# Altium PCB gba-zero.PcbDoc
Units mm, origin at the board's own origin, x right, y up, seen from the top; angles counter-clockwise.
Board outline 130.69 x 72.91 mm, 16 copper layers (Top, Route2, Route3, Route4, Route5, Route6, Route7, Route8, Route9, Route10, Route11, Route12, Route13, Route14, Route15, Bottom), stack 0.888 mm thick; 60 components, 64 nets, 294 pads, 51 vias.
Unrouted connection lines stored in the file: 12.
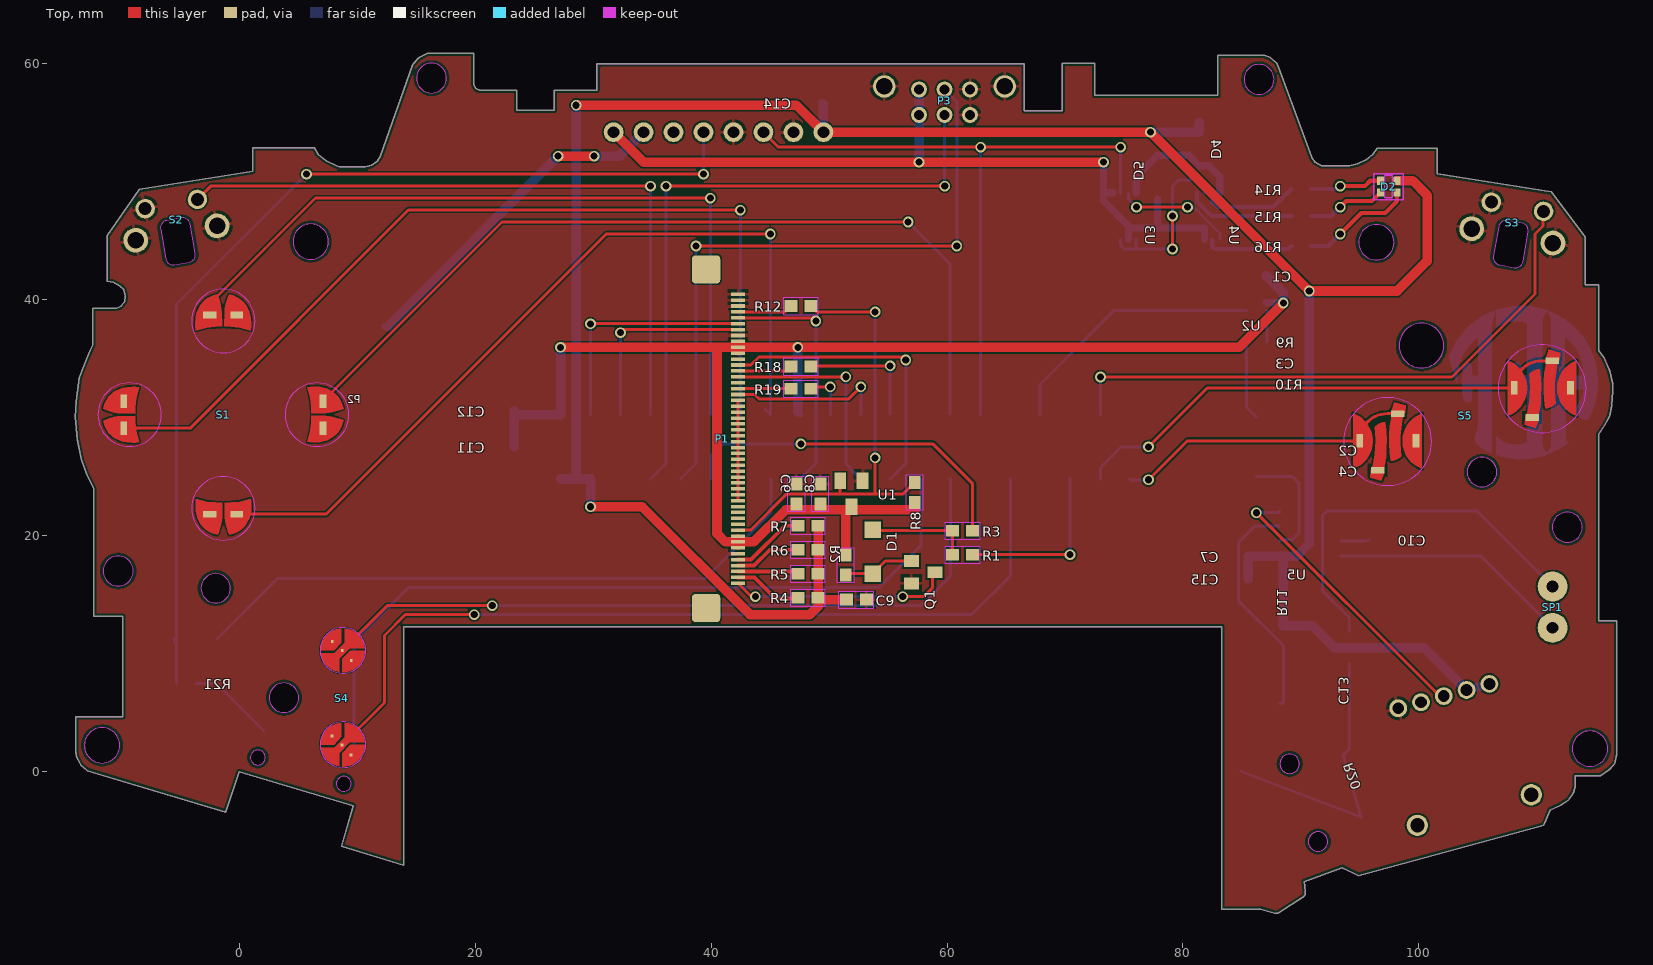
[diagram p0: Top view]
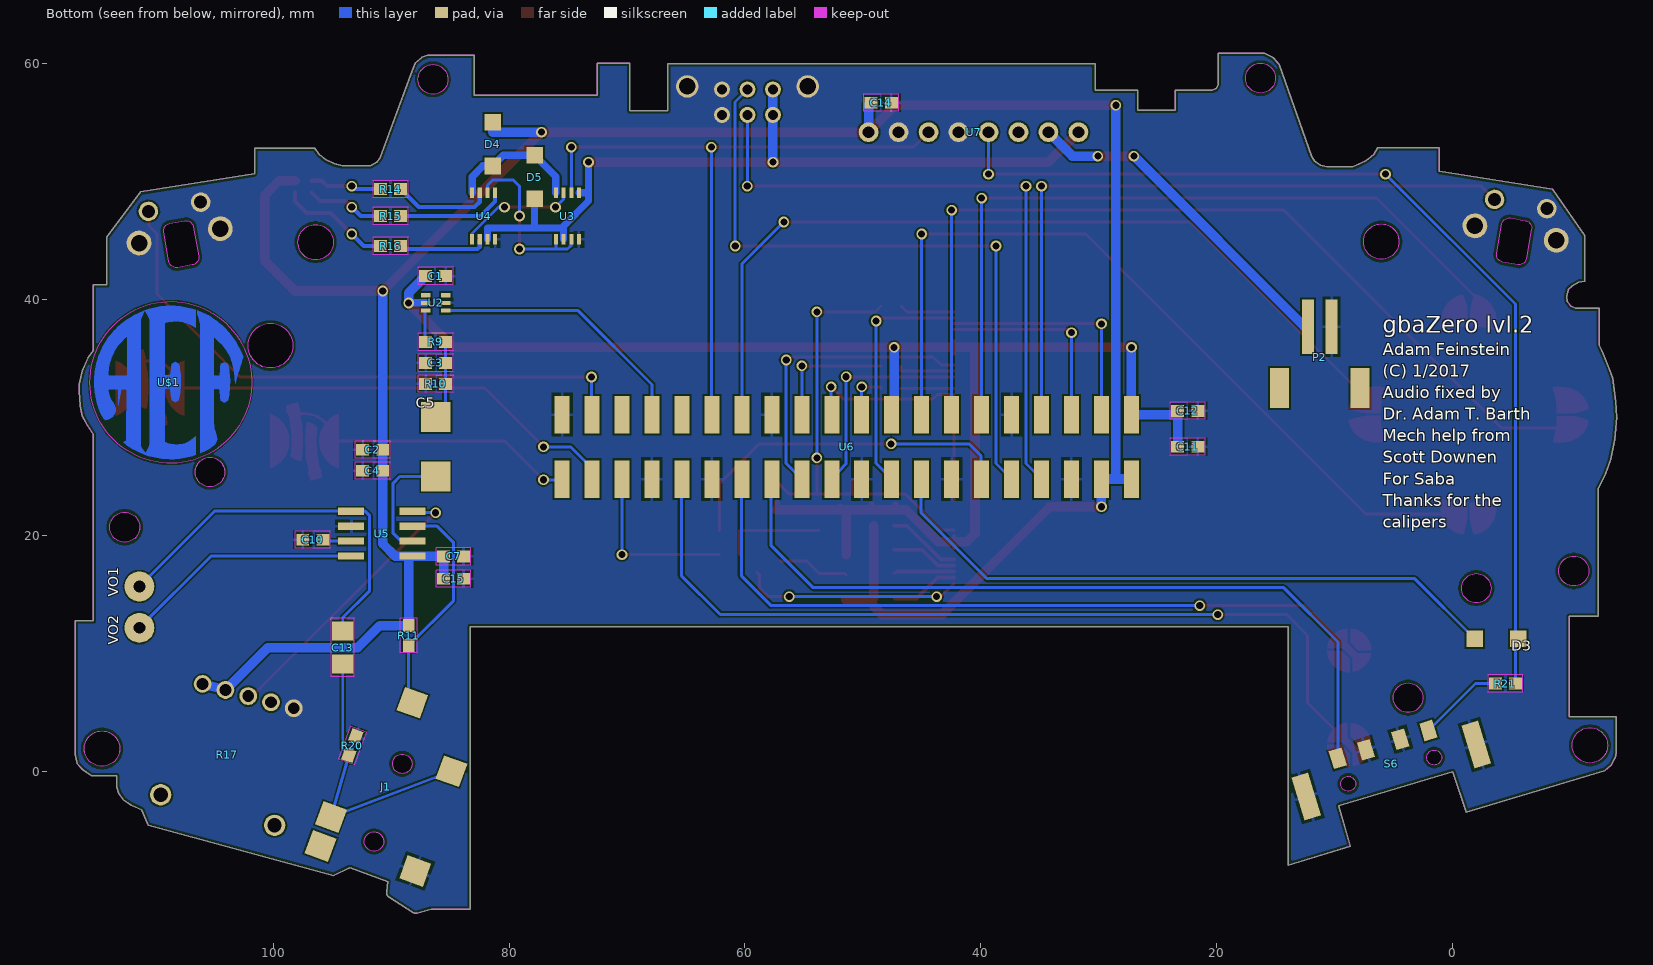
[diagram p1: Bottom view, seen from below]

## Layer stack, top to bottom
Top Solder: solder mask 0.0102, Solder Resist, Dk 3.5
Top: signal copper 0.035
Dielectric 1: dielectric 0.32, FR-4, Dk 4.8
Route2: signal copper 0.0356
Route3: signal copper 0.0356
Route4: signal copper 0.0356
Route5: signal copper 0.0356
Route6: signal copper 0.0356
Route7: signal copper 0.0356
Route8: signal copper 0.0356
Route9: signal copper 0.0356
Route10: signal copper 0.0356
Route11: signal copper 0.0356
Route12: signal copper 0.0356
Route13: signal copper 0.0356
Route14: signal copper 0.0356
Route15: signal copper 0.0356
Bottom: signal copper 0.035
Bottom Solder: solder mask 0.0102, Solder Resist, Dk 3.5

## Board outline
13.941,-7.91 8.672,-6.307 9.667,-2.893 0,0 -1.13,-3.416 -12.889,0.101 -13.412,0.559 -13.772,1.197 -13.842,1.641 -13.842,4.674 -9.873,4.674 -9.873,13.173 -12.35,13.173 -12.35,24.041 -12.937,25.188 -13.372,26.486 -13.716,28.169 -13.908,30.045 -13.824,31.41 -13.565,33.377 -13.188,34.374 -12.753,35.437 -12.435,36.149 -12.398,36.238 -12.398,39.312 -10.385,39.312 -10.023,39.456 -9.721,39.851 -9.674,40.306 -9.768,40.869 -10.143,41.204 -10.673,41.485 -11.202,41.579 -11.202,45.437 -8.467,49.373 1.152,50.917 1.152,52.905 6.374,52.905 6.688,52.33 7.369,51.807 8.269,51.357 8.491,51.284 10.692,51.284 11.215,51.414 11.699,51.754 11.948,52.146 14.709,59.957 15.211,60.533 15.965,60.92 19.895,60.92 19.895,58.271 20.045,57.936 20.397,57.769 23.529,57.769 23.529,56.071 26.71,56.071 26.71,57.788 30.329,57.788 30.327,60.006 66.56,60.006 66.56,56.028 69.749,56.028 69.749,60.067 72.529,60.067 72.529,57.336 82.944,57.336 82.944,60.725 86.908,60.725 87.393,60.555 87.968,60.071 88.217,59.443 90.899,52.091 91.223,51.662 91.725,51.369 94.122,51.369 94.792,51.536 95.525,51.882 96.079,52.321 96.477,52.876 101.574,52.876 101.574,50.699 111.215,49.173 114.093,45.319 114.093,41.276 115.233,41.276 115.233,35.701 115.69,35.094 116.162,33.984 116.423,32.875 116.423,32.257 116.339,31.012 116.162,30.154 115.732,29.337 115.23,28.605 115.23,12.798 116.782,12.798 116.782,1.473 116.62,0.695 116.134,0.176 115.397,-0.335 113.271,-0.335 113.271,-1.285 113.072,-1.83 112.674,-2.395 112.025,-2.824 111.12,-3.239 110.675,-4.327 110.587,-4.527 94.867,-8.795 93.495,-8.121 90.266,-9.303 90.381,-10.137 cw(c89.878,-10.207) 90.154,-10.633 88.183,-11.91 cw(c87.907,-11.484) 87.777,-11.975 86.596,-11.664 ccw(c86.467,-12.155) 86.469,-11.647 83.268,-11.647 83.268,12.308 13.941,12.308
cut-out: 106.838,42.965 108.089,42.745 ccw(c108.199,43.37) 108.824,43.26 109.265,45.761 ccw(c108.64,45.872) 108.75,46.497 107.5,46.717 ccw(c107.389,46.092) 106.764,46.202 106.323,43.701 ccw(c106.948,43.591)
cut-out: -5.492,42.98 -4.241,43.2 ccw(c-4.351,43.826) -3.726,43.936 -4.167,46.437 ccw(c-4.792,46.327) -4.902,46.952 -6.153,46.732 ccw(c-6.043,46.106) -6.668,45.996 -6.227,43.495 ccw(c-5.602,43.605)
cut-out: 100.223,34.231 ccw(c100.223,36.131) 102.123,36.131 ccw(c100.223,36.131) 100.223,38.031 ccw(c100.223,36.131) 98.323,36.131 ccw(c100.223,36.131)
cut-out: 96.397,43.389 ccw(c96.397,44.889) 97.897,44.889 ccw(c96.397,44.889) 96.397,46.389 ccw(c96.397,44.889) 94.897,44.889 ccw(c96.397,44.889)
cut-out: 114.503,0.469 ccw(c114.503,1.968) 116.003,1.968 ccw(c114.503,1.968) 114.503,3.468 ccw(c114.503,1.968) 113.003,1.968 ccw(c114.503,1.968)
cut-out: 6.063,43.445 ccw(c6.063,44.945) 7.563,44.945 ccw(c6.063,44.945) 6.063,46.445 ccw(c6.063,44.945) 4.563,44.945 ccw(c6.063,44.945)
cut-out: -11.623,0.743 ccw(c-11.623,2.243) -10.123,2.243 ccw(c-11.623,2.243) -11.623,3.743 ccw(c-11.623,2.243) -13.123,2.243 ccw(c-11.623,2.243)
cut-out: -10.257,15.751 ccw(c-10.257,17.021) -8.987,17.021 ccw(c-10.257,17.021) -10.257,18.291 ccw(c-10.257,17.021) -11.527,17.021 ccw(c-10.257,17.021)
cut-out: 112.578,19.462 ccw(c112.578,20.732) 113.848,20.732 ccw(c112.578,20.732) 112.578,22.002 ccw(c112.578,20.732) 111.308,20.732 ccw(c112.578,20.732)
cut-out: 86.448,57.427 ccw(c86.448,58.697) 87.718,58.697 ccw(c86.448,58.697) 86.448,59.967 ccw(c86.448,58.697) 85.178,58.697 ccw(c86.448,58.697)
cut-out: 16.301,57.531 ccw(c16.301,58.801) 17.571,58.801 ccw(c16.301,58.801) 16.301,60.071 ccw(c16.301,58.801) 15.031,58.801 ccw(c16.301,58.801)
cut-out: 3.79,5.03 ccw(c3.79,6.28) 5.04,6.28 ccw(c3.79,6.28) 3.79,7.53 ccw(c3.79,6.28) 2.54,6.28 ccw(c3.79,6.28)
cut-out: -1.991,14.316 ccw(c-1.991,15.566) -0.741,15.566 ccw(c-1.991,15.566) -1.991,16.816 ccw(c-1.991,15.566) -3.241,15.566 ccw(c-1.991,15.566)
cut-out: 105.349,24.163 ccw(c105.349,25.413) 106.599,25.413 ccw(c105.349,25.413) 105.349,26.663 ccw(c105.349,25.413) 104.098,25.413 ccw(c105.349,25.413)
cut-out: 91.449,-6.736 ccw(c91.449,-5.91) 92.274,-5.91 ccw(c91.449,-5.91) 91.449,-5.085 ccw(c91.449,-5.91) 90.623,-5.91 ccw(c91.449,-5.91)
cut-out: 89.051,-0.148 ccw(c89.051,0.677) 89.876,0.677 ccw(c89.051,0.677) 89.051,1.503 ccw(c89.051,0.677) 88.225,0.677 ccw(c89.051,0.677)
cut-out: 8.868,-1.653 ccw(c8.868,-1.018) 9.503,-1.018 ccw(c8.868,-1.018) 8.868,-0.383 ccw(c8.868,-1.018) 8.233,-1.018 ccw(c8.868,-1.018)
cut-out: 1.58,0.575 ccw(c1.58,1.21) 2.215,1.21 ccw(c1.58,1.21) 1.58,1.845 ccw(c1.58,1.21) 0.945,1.21 ccw(c1.58,1.21)

## Design rules (kind name [scope] priority, off if disabled: settings)
BoardOutlineClearance mdCopperDimension [All] p1: gap=0.254 ignorepadtopadclearanceinfootprint=FALSE except(0: Arc-SplitContinuation Track-SplitContinuation SMDPad-SplitContinuation THPad-SplitContinuation Via-SplitContinuation Fill-SplitContinuation Poly-SplitContinuation Region-SplitContinuation Text-SplitContinuation)
Clearance "Clearance (Same Net)" [All] p1: gap=0.152 ignorepadtopadclearanceinfootprint=FALSE
Clearance [All] p2: gap=0.152 ignorepadtopadclearanceinfootprint=FALSE
HoleSize [All] p1: absolutevalues=TRUE maxlimit=2540 minlimit=0.305 maxpercent=80.000 minpercent=20.000
HoleToHoleClearance mdDrill [All] p1: gap=0.254 allowstackedmicrovias=TRUE
MinimumSolderMaskSliver [All] p1 off: minsoldermaskwidth=0.254
PasteMaskExpansion mlMinCreamFrame [All] p1: expansion=0
PolygonConnect PolygonConnect_For_PolygonThermal_ON_Width100000_Gap100000 [InPolygonClass('PolygonThermal_ON_Width100000_Gap100000') vs Not IsVia] p1: connectstyle=Relief reliefconductorwidth=0.254 reliefentries=4 polygonreliefangle="90 Angle" airgapwidth=0.254
PolygonConnect ThermalVias [IsVia] p2: connectstyle=Direct reliefconductorwidth=0.254 reliefentries=4 polygonreliefangle="90 Angle" airgapwidth=0.254
PolygonConnect [All] p3: connectstyle=Relief reliefconductorwidth=0.254 reliefentries=4 polygonreliefangle="90 Angle" airgapwidth=0.254
RoutingVias [All] p1: holewidth=0.305 width=0.61 viastyle="Through Hole" minholewidth=0.305 minwidth=0.61 maxholewidth=2.54 maxwidth=2.54
SolderMaskExpansion mlMinStopFrame [All] p1: expansion=0.051 istentingtop=FALSE
Width [All] p1: maxlimit=0.254 minlimit=0.152 preferedwidth=0.152
26 further rules are at their usual default settings.

## Classes and differential pairs
polygon class PolygonThermal_ON_Width100000_Gap100000: Polygon_1_Net_GND Polygon_2_Net_GND

## Components (designator, comment, footprint, x,y, rotation, side; value= is the part's Value field where it differs from the comment)
C1 "0.1μF" 0603 86.222,42.026 r0 bottom
C2 "10μF" 0603 91.556,27.294 r0 bottom
C3 "0.1μF" 0603 86.222,34.66 r0 bottom
C4 "10μF" 0603 91.556,25.516 r0 bottom
C5 "47μF" EIA6032-28/C-R 86.222,27.548 r90 bottom
C6 "10μF" 0603 47.233,23.56 r90 top
C7 "0.1μF" 0603 84.698,18.252 r180 bottom
C8 "0.1μF" 0603 49.265,23.56 r90 top
C9 "10μF" 0603 52.313,14.594 r0 top
C10 "10μF" 0603 96.636,19.674 r0 bottom
C11 "10μF" 0603 22.468,27.548 r180 bottom
C12 "0.1μF" 0603 22.468,30.596 r180 bottom
C13 "100μF" 1206 94.096,10.53 r270 bottom
C14 "10μF" 0603 48.449,56.717 r180 bottom
C15 "10μF" 0603 84.698,16.372 r180 bottom
D1 "B0540WQ-7-F" SOD-123 53.71,18.658 r270 top
D2 "" WL-SBCW-0606 97.443,49.598 r180 top
D3 "B0540WQ-7-F" SOD-123 -3.694,11.292 r0 bottom
D4 "B0540WQ-7-F" SOD-123 81.396,53.202 r90 bottom
D5 "B0540WQ-7-F" SOD-123 77.84,50.408 r270 bottom
J1 "" 4-JACK-SMD 89.831,-10.229 r110 bottom
P1 "" FPC-50-CON 39.638,28.234 r270 top
P2 "" JSTPH2 11.276,34.028 r0 bottom
P3 "" LINK_CONNECTOR 59.789,55.683 r0 top
Q1 "BSS138" SOT23-WIDE 57.979,16.921 r270 top
R1 "0" 0603 61.33,18.404 r0 top
R2 "3.9K" 0603 51.424,17.538 r90 top
R3 "0" 0603 61.33,20.436 r0 top
R4 "100" 0603 48.226,14.762 r180 top
R5 "100" 0603 48.226,16.794 r180 top
R6 "100" 0603 48.226,18.826 r180 top
R7 "100" 0603 48.226,20.858 r180 top
R8 "10K" 0603 57.266,23.69 r270 top
R9 "220" 0603 86.222,36.438 r0 bottom
R10 "100" 0603 86.222,32.882 r0 bottom
R11 "100K" 0603 88.508,11.546 r90 bottom
R12 "0" 0603 47.614,39.486 r180 top
R14 "250" 0603 90.032,49.392 r180 bottom
R15 "250" 0603 90.032,47.106 r180 bottom
R16 "167" 0603 90.032,44.566 r180 bottom
R17 "" RK10J12E0A0A 102.109,6.418 r15 bottom
R18 "22" 0603 47.614,34.355 r180 top
R19 "22" 0603 47.614,32.476 r180 top
R20 "150" 0603 93.288,2.212 r290 bottom
R21 "10K" 0603 -4.456,7.482 r0 bottom
S1 "" ?#1 -1.347,30.277 r0 top
S2 "" ?#2 -5.321,45.666 r10 top
S3 "" ?#2 107.918,45.431 r350 top
S4 "" START_SELECT_BUTTON 8.79,6.293 r0 top
S5 "" ?#3 103.9,30.24 r0 top
S6 "" PWR-SWITCH 5.224,0.096 r163 bottom
SP1 "" SPEAKER 111.336,13.959 r270 top
U1 "APX803" SOT23 51.891,23.586 r180 top
U2 "" SC-70-6 86.222,39.74 r0 bottom
U3 "74LVC2G02" TSSOP-8 75.046,47.106 r90 bottom
U4 "74LVC3G04" TSSOP-8 82.158,47.106 r90 bottom
U5 "LM4875" SO-8 90.794,20.182 r0 bottom
U6 "" RPI-SMD 51.373,27.548 r0 bottom
U7 "" POWERBOOST-1000C 18.912,55.488 r0 bottom
U$1 "" SIGNATURE 108.853,33.009 r180 bottom

## Footprints (in the part's own frame and the unit in brackets; to place one, negate y for a bottom-side part, rotate by r counter-clockwise, add the part's x,y. Pads: shape width x height; smd on the part's side, far side on the other; paste and mask are expansions set on the pad)
4-JACK-SMD [mil] "4-JACK-SMD"
  rect 83x83 smd: 1(93,-45) 2(166,281) 3(447,-45) 4(63,281) 5(617,156)
0603 [mm] "0603"
  rect 1.1x1 smd: 1(-0.85,0) 2(0.85,0)
  Top keep-out lines w0.051: -1.473,0.729 -1.473,-0.729 1.473,-0.729 1.473,0.729 -1.473,0.729
1206 [mm] "1206"
  rect 1.6x1.8 smd: 1(-1.4,0) 2(1.4,0)
  Top keep-out lines w0.051: 2.473,0.983 2.473,-0.983 -2.473,-0.983 -2.473,0.983 2.473,0.983
EIA6032-28/C-R [mm] "EIA6032-28/C-R"
  rect 2.55x2.5 smd: +(2.525,0) -(-2.525,0)
FPC-50-CON [mm] "FPC-50-CON"
  rect 0.3x1.2 smd: 1(12.25,2.65) 2(11.75,2.65) 3(11.25,2.65) 4(10.75,2.65) 5(10.25,2.65) 6(9.75,2.65) 7(9.25,2.65) 8(8.75,2.65) 9(8.25,2.65) 10(7.75,2.65) 11(7.25,2.65) 12(6.75,2.65) 13(6.25,2.65) 14(5.75,2.65) 15(5.25,2.65) 16(4.75,2.65) 17(4.25,2.65) 18(3.75,2.65) 19(3.25,2.65) 20(2.75,2.65) 21(2.25,2.65) 22(1.75,2.65) 23(1.25,2.65) 24(0.75,2.65) 25(0.25,2.65) 26(-0.25,2.65) 27(-0.75,2.65) 28(-1.25,2.65) 29(-1.75,2.65) 30(-2.25,2.65) 31(-2.75,2.65) 32(-3.25,2.65) 33(-3.75,2.65) 34(-4.25,2.65) 35(-4.75,2.65) 36(-5.25,2.65) 37(-5.75,2.65) 38(-6.25,2.65) 39(-6.75,2.65) 40(-7.25,2.65) 41(-7.75,2.65) 42(-8.25,2.65) 43(-8.75,2.65) 44(-9.25,2.65) 45(-9.75,2.65) 46(-10.25,2.65) 47(-10.75,2.65) 48(-11.25,2.65) 49(-11.75,2.65) 50(-12.25,2.65)
  rrect25% 2.4x2.4 smd: PAD1(14.35,-0.06) PAD2(-14.35,-0.06)
JSTPH2 [mm] "JSTPH2"
  rect 1x4.6 smd: BAT(1,-3.7) GND(-1,-3.7)
  rect 1.6x3.4 smd: NC1(-3.4,1.5) NC2(3.4,1.5)
LINK_CONNECTOR [mil] "LINK_CONNECTOR"
  round 53 hole 33: 1(-85,85) 2(-85,0) 3(0,85) 4(0,0) 5(85,85) 6(85,0)
  round 75 hole 55: GND@1(-201,95) GND@2(201,95)
POWERBOOST-1000C [mil] "POWERBOOST-1000C"
  round 66 hole 39.37: 5V(1205,50) BAT(605,50) EN(805,50) GND@1(905,50) GND@2(1105,50) LBO(1005,50) USB(505,50) VS(705,50)
PWR-SWITCH [mil] "PWR-SWITCH"
  rect 45x63 smd: C@1(-60,91.5) C@2(60,91.5) L(-158,91.5) R(158,91.5)
  rect 58x150 smd: GND@1(-296.5,0) GND@2(296.5,0)
RK10J12E0A0A [mm] "RK10J12E0A0A"
  round 1.508 hole 1: 1(-4,0) 2(0,0) 2O(-2,0) 3(2,0) 3O(4,0)
  round 1.8 hole 1.2: P$6(-5,10) P$7(5,10)
RPI-SMD [mil] "RPI-SMD"
  rect 50x125 smd: 1(-950,-107.5) 2(-950,107.5) 3(-850,-107.5) 4(-850,107.5) 5(-750,-107.5) 6(-750,107.5) 7(-650,-107.5) 8(-650,107.5) 9(-550,-107.5) 10(-550,107.5) 11(-450,-107.5) 12(-450,107.5) 13(-350,-107.5) 14(-350,107.5) 15(-250,-107.5) 16(-250,107.5) 17(-150,-107.5) 18(-150,107.5) 19(-50,-107.5) 20(-50,107.5) 21(50,-107.5) 22(50,107.5) 23(150,-107.5) 24(150,107.5) 25(250,-107.5) 26(250,107.5) 27(350,-107.5) 28(350,107.5) 29(450,-107.5) 30(450,107.5) 31(550,-107.5) 32(550,107.5) 33(650,-107.5) 34(650,107.5) 35(750,-107.5) 36(750,107.5) 37(850,-107.5) 38(850,107.5) 39(950,-107.5) 40(950,107.5)
SC-70-6 [mm] "SC-70-6"
  rect 0.8x0.35 smd: 1(-0.85,0.65) 2(-0.85,0) 3(-0.85,-0.65) 4(0.85,-0.65) 5(0.85,0) 6(0.85,0.65)
SIGNATURE [mm] "SIGNATURE"
  Top region: -4.01,-0.572 -4.028,-0.572 -3.827,-0.572 -3.657,-0.572 -3.578,-0.605 -3.547,-0.687 -3.55,-0.864 -3.554,-1.07 -3.557,-1.275 -3.56,-1.479 -3.563,-1.684 -3.566,-1.89 -3.568,-2.095 -3.571,-2.3 -3.574,-2.505 -3.577,-2.71 -3.579,-2.915 -3.582,-3.12 -3.584,-3.325 -3.586,-3.531 -3.588,-3.736 -3.59,-3.941 -3.592,-4.146 -3.594,-4.352 -3.595,-4.557 -3.596,-4.763 -3.596,-4.89 -3.862,-5.085 -3.537,-5.33 -3.37,-5.446 -3.198,-5.558 -3.024,-5.663 -2.845,-5.762 -2.663,-5.855 -2.477,-5.94 -1.749,-6.245 -2.235,-5.628 -2.331,-5.477 -2.382,-5.326 -2.382,-5.142 -2.382,-4.933 -2.382,-4.725 -2.382,-4.516 -2.382,-4.307 -2.382,-4.099 -2.382,-3.89 -2.382,-3.681 -2.382,-3.473 -2.382,-3.264 -2.382,-3.055 -2.382,-2.847 -2.382,-2.638 -2.382,-2.429 -2.382,-2.22 -2.382,-2.012 -2.382,-1.803 -2.382,-1.594 -2.382,-1.386 -2.382,-1.177 -2.382,-0.968 -2.382,-0.759 -2.382,-0.551 -2.382,-0.342 -2.382,-0.133 -2.382,0.075 -2.382,0.284 -2.382,0.493 -2.382,0.702 -2.382,0.91 -2.382,1.119 -2.382,1.328 -2.382,1.536 -2.382,1.745 -2.382,1.954 -2.382,2.162 -2.382,2.371 -2.382,2.58 -2.382,2.788 -2.382,2.997 -2.382,3.206 -2.382,3.415 -2.382,3.623 -2.382,3.832 -2.382,4.041 -2.382,4.249 -2.382,4.458 -2.382,4.667 -2.382,4.876 -2.382,5.075 -2.36,5.247 -2.314,5.421 -2.256,5.594 -2.046,6.134 -2.584,5.877 -2.775,5.779 -2.963,5.677 -3.148,5.57 -3.33,5.457 -3.509,5.339 -3.685,5.215 -3.856,5.086 -4.023,4.952 -4.187,4.812 -4.288,4.72 -4.288,3.144 -3.91,3.549 -3.766,3.687 -3.612,3.819 -3.455,3.939 -3.521,3.895 -3.521,3.971 -3.521,3.764 -3.521,3.557 -3.521,3.351 -3.521,3.144 -3.521,2.938 -3.521,2.731 -3.521,2.524 -3.521,2.318 -3.521,2.111 -3.521,1.904 -3.521,1.698 -3.521,1.491 -3.521,1.285 -3.521,1.078 -3.521,0.872 -3.521,0.698 -3.563,0.607 -3.658,0.567 -3.828,0.567 -4.028,0.567 -4.288,0.567 -4.288,-1.961
  Top region: -3.982,-0.514 -3.982,0.569 -4.229,0.569 -4.429,0.569 -4.63,0.569 -4.831,0.569 -4.996,0.569 -5.076,0.608 -5.11,0.695 -5.105,0.863 -5.089,1.062 -5.063,1.26 -5.026,1.456 -4.98,1.651 -4.924,1.844 -4.859,2.034 -4.786,2.22 -4.703,2.403 -4.613,2.583 -4.515,2.758 -4.409,2.928 -4.295,3.094 -4.174,3.253 -4.045,3.406 -3.982,3.474 -3.982,5.002 -4.345,4.67 -4.499,4.52 -4.647,4.364 -4.79,4.204 -4.928,4.038 -5.06,3.868 -5.186,3.694 -5.305,3.515 -5.419,3.332 -5.526,3.145 -5.626,2.955 -5.719,2.761 -5.806,2.564 -5.885,2.365 -5.958,2.163 -6.024,1.958 -6.083,1.751 -6.135,1.543 -6.181,1.332 -6.219,1.121 -6.251,0.909 -6.276,0.696 -6.295,0.482 -6.306,0.267 -6.311,0.053 -6.309,-0.162 -6.301,-0.376 -6.285,-0.591 -6.263,-0.804 -6.235,-1.017 -6.199,-1.229 -6.157,-1.439 -6.107,-1.649 -6.049,-1.856 -5.985,-2.062 -5.912,-2.265 -5.831,-2.466 -5.741,-2.663 -5.641,-2.856 -5.516,-3.07 -5.314,-3.21 -5.093,-3.146 -4.902,-3.051 -4.729,-2.916 -4.608,-2.752 -4.515,-2.573 -4.465,-2.367 -4.48,-2.15 -4.554,-1.959 -4.654,-1.784 -4.757,-1.621 -4.856,-1.471 -4.945,-1.317 -5.01,-1.162 -5.056,-0.997 -5.088,-0.828 -5.108,-0.679 -5.082,-0.606 -5.002,-0.573 -4.831,-0.573 -4.631,-0.573 -4.43,-0.573 -4.229,-0.573 -4.1,-0.573
  Top region: 224 vertices and 0 holes, not listed, extent -2.015,-6.501 2.302,6.504
  Top region: 198 vertices and 0 holes, not listed, extent 2.405,-6.013 6.32,6.106
  Top keep-out circle w0: c0.178,0 r6.858
SO-8 [mm] "SO-8"
  rect 2.2x0.6 smd: 1(-2.6,1.905) 2(-2.6,0.635) 3(-2.6,-0.635) 4(-2.6,-1.905) 5(2.6,-1.905) 6(2.6,-0.635) 7(2.6,0.635) 8(2.6,1.905)
SOD-123 [mm] "SOD-123"
  rect 1.4x1.4 smd: A(1.85,0) C(-1.85,0)
SOT23 [mm] "SOT23"
  rect 1x1.4 smd: 1(-0.95,-1.1) 2(0.95,-1.1) 3(0,1.1)
SOT23-WIDE [mm] "SOT23-WIDE"
  rect 1x1.27 smd: 1(-0.95,-1) 2(0.95,-1) 3(0,1)
SPEAKER [mm] "SPEAKER"
  round 2.54 hole 1: 1(-1.75,0) 2(1.75,0)
START_SELECT_BUTTON [mm] "START_SELECT_BUTTON"
  rect 0.23x0.23 smd: GND@1(-0.919,-3.263) GND@2(0.689,-4.871) GND@3(-0.896,4.756) GND@4(0.712,3.148) SEL(-0.069,-4.021) STR(-0.046,3.998)
  Top region: -1.846,3.753 -0.744,3.753 0.154,4.65 0.154,5.844 0.281,5.844 1.044,5.561 1.606,4.973 1.854,4.198 1.854,4.198 0.584,4.198 -0.314,3.278 -0.314,2.159 -1.009,2.426 -1.548,2.94 -1.846,3.622 -1.846,3.622
  Top region: -0.053,2.13 -0.053,3.289 0.616,3.982 1.872,3.982 1.624,3.086 0.98,2.415 0.094,2.13 0.094,2.13
  Top region: -1.868,4.014 -0.749,4.014 -0.131,4.657 -0.131,5.849 -0.964,5.607 -1.591,5.007 -1.868,4.185 -1.868,4.185
  Top region: -1.846,-4.244 -0.744,-4.244 0.154,-3.346 0.154,-2.153 0.281,-2.153 1.044,-2.435 1.606,-3.024 1.854,-3.799 1.854,-3.799 0.584,-3.799 -0.314,-4.718 -0.314,-5.837 -1.009,-5.57 -1.548,-5.056 -1.846,-4.374 -1.846,-4.374
  Top region: -0.053,-5.866 -0.053,-4.707 0.616,-4.014 1.872,-4.014 1.624,-4.91 0.98,-5.581 0.094,-5.866 0.094,-5.866
  Top region: -1.868,-3.982 -0.749,-3.982 -0.131,-3.339 -0.131,-2.148 -0.964,-2.389 -1.591,-2.989 -1.868,-3.811 -1.868,-3.811
  Top keep-out circle w0.102: c0,3.998 r1.935
  Top keep-out circle w0.102: c0,-3.998 r1.935
TSSOP-8 [mm] "TSSOP-8"
  rect 0.9x0.35 smd: 1(-1.975,0.975) 2(-1.975,0.325) 3(-1.975,-0.325) 4(-1.975,-0.975) 5(1.975,-0.975) 6(1.975,-0.325) 7(1.975,0.325) 8(1.975,0.975)
WL-SBCW-0606 [mm] "WL-SBCW-0606"
  rect 0.6x0.7 smd: B(0.7,-0.5) G(0.7,0.5) R(-0.7,0.5) VCC(-0.7,-0.5)
  Top keep-out lines w0.127: 1.25,1.1 1.25,-1.1 -1.25,-1.1 -1.25,1.1 1.25,1.1 ; 0.317,0.953 0.318,-0.953 -0.317,-0.953 -0.318,0.953 0.317,0.953
?#1 [mm] "D-PAD"
  rect 1.039x0.575 smd: DOWN(1.149,-8.444) GND@1(1.149,8.444)
  rect 0.575x1.149 smd: GND@2(-8.444,1.149) GND@4(8.444,-1.149) LEFT(-8.444,-1.149) RIGHT(8.444,1.149)
  rect 1.149x0.575 smd: GND@3(-1.149,-8.444) UP(-1.149,8.444)
  Top region: -7.476,-0.106 -8.701,-0.131 -8.983,-0.154 -9.241,-0.201 -9.545,-0.271 -9.895,-0.388 -10.189,-0.505 -10.102,-0.851 -10.006,-1.09 -9.888,-1.303 -9.744,-1.519 -9.507,-1.756 -9.291,-1.948 -9.101,-2.043 -8.841,-2.184 -8.532,-2.28 -8.178,-2.351 -7.734,-2.374 -7.429,-2.374 -7.13,-2.341 -7.381,-1.411 -7.449,-0.663
  Top region: -7.476,0.083 -8.701,0.108 -8.983,0.131 -9.241,0.178 -9.545,0.248 -9.895,0.365 -10.189,0.483 -10.102,0.828 -10.006,1.067 -9.888,1.28 -9.744,1.496 -9.507,1.733 -9.291,1.925 -9.101,2.02 -8.842,2.161 -8.532,2.257 -8.178,2.328 -7.734,2.351 -7.429,2.351 -7.13,2.318 -7.381,1.388 -7.449,0.64
  Top region: 7.476,0.106 8.701,0.131 8.983,0.154 9.241,0.201 9.545,0.271 9.895,0.388 10.189,0.505 10.102,0.851 10.006,1.09 9.888,1.303 9.744,1.519 9.507,1.756 9.291,1.948 9.101,2.043 8.841,2.184 8.532,2.28 8.178,2.351 7.734,2.374 7.429,2.374 7.13,2.341 7.381,1.411 7.449,0.663
  Top region: 7.476,-0.083 8.701,-0.108 8.983,-0.131 9.241,-0.178 9.545,-0.248 9.895,-0.365 10.189,-0.483 10.102,-0.828 10.006,-1.067 9.888,-1.28 9.744,-1.496 9.507,-1.733 9.291,-1.925 9.101,-2.02 8.842,-2.161 8.532,-2.257 8.178,-2.328 7.734,-2.351 7.429,-2.351 7.13,-2.318 7.381,-1.388 7.449,-0.64
  Top region: 0.106,-7.476 0.131,-8.701 0.154,-8.983 0.201,-9.241 0.271,-9.545 0.388,-9.895 0.505,-10.189 0.851,-10.102 1.09,-10.006 1.303,-9.888 1.519,-9.744 1.756,-9.507 1.948,-9.291 2.043,-9.101 2.184,-8.841 2.28,-8.532 2.351,-8.178 2.374,-7.734 2.374,-7.429 2.341,-7.13 1.411,-7.381 0.663,-7.449
  Top region: -0.083,-7.476 -0.108,-8.701 -0.131,-8.983 -0.178,-9.241 -0.248,-9.545 -0.365,-9.895 -0.483,-10.189 -0.828,-10.102 -1.067,-10.006 -1.28,-9.888 -1.496,-9.744 -1.733,-9.507 -1.925,-9.291 -2.02,-9.101 -2.161,-8.842 -2.257,-8.532 -2.328,-8.178 -2.351,-7.734 -2.351,-7.429 -2.318,-7.13 -1.388,-7.381 -0.64,-7.449
  Top region: -0.106,7.476 -0.131,8.701 -0.154,8.983 -0.201,9.241 -0.271,9.545 -0.388,9.895 -0.505,10.189 -0.851,10.102 -1.09,10.006 -1.303,9.888 -1.519,9.744 -1.756,9.507 -1.948,9.291 -2.043,9.101 -2.184,8.841 -2.28,8.532 -2.351,8.178 -2.374,7.734 -2.374,7.429 -2.341,7.13 -1.411,7.381 -0.663,7.449
  Top region: 0.083,7.476 0.108,8.701 0.131,8.983 0.178,9.241 0.248,9.545 0.365,9.895 0.483,10.189 0.828,10.102 1.067,10.006 1.28,9.888 1.496,9.744 1.733,9.507 1.925,9.291 2.02,9.101 2.161,8.842 2.257,8.532 2.328,8.178 2.351,7.734 2.351,7.429 2.318,7.13 1.388,7.381 0.64,7.449
  Top keep-out circle w0.102: c0,-7.941 r2.693
  Top keep-out circle w0.102: c7.941,0 r2.693
  Top keep-out circle w0.102: c0,7.941 r2.693
  Top keep-out circle w0.102: c-7.941,0 r2.693
?#2 [mm] "SHOULDER_BUTTON"
  round 2.1 hole 1.4: GND@1(-3.5,0) GND@3(3.5,0)
  round 1.65 hole 1.1: GND@2(-2.25,2.5) SW(2.25,2.5)
?#3 [mm] "AB_BUTTON"
  rect 0.575x1.149 smd: A@1(4.182,2.298) B@1(-8.915,-2.183) GND@2(-4.136,-2.183) GND@4(8.961,2.298)
  rect 1.149x0.575 smd: A@2(7.422,4.595) B@2(-5.675,0.115) GND@1(-7.399,-4.687) GND@3(5.698,-0.207)
  Top region: 9.451,-0.065 9.451,4.615 8.45,3.942 7.883,2.878 7.883,1.672 8.45,0.608 9.451,-0.065
  Top region: 3.646,4.615 3.646,-0.065 4.647,0.608 5.214,1.672 5.214,2.878 4.647,3.942 3.646,4.615
  Top region: -3.646,-4.546 -3.646,0.134 -4.647,-0.539 -5.214,-1.603 -5.214,-2.809 -4.647,-3.873 -3.646,-4.546
  Top region: -9.451,0.134 -9.451,-4.546 -8.45,-3.873 -7.883,-2.809 -7.883,-1.603 -8.45,-0.539 -9.451,0.134
  Top region: 8.075,5.296 7.12,5.561 6.88,4.868 6.951,4.702 6.841,4.173 6.725,3.524 6.702,2.829 6.679,2.067 6.725,1.303 6.802,0.59 7.022,0.59 7.343,0.713 7.683,0.949 7.658,1.521 7.613,2.115 7.635,2.703 7.704,3.345 7.795,4.054 7.883,4.447 8.048,4.66
  Top region: 5.068,-0.839 6.023,-1.103 6.262,-0.411 6.191,-0.245 6.302,0.284 6.418,0.934 6.441,1.629 6.464,2.391 6.418,3.154 6.341,3.867 6.121,3.867 5.8,3.744 5.459,3.508 5.484,2.936 5.53,2.342 5.508,1.754 5.439,1.113 5.348,0.404 5.26,0.01 5.095,-0.202
  Top region: -5.022,0.815 -5.977,1.081 -6.217,0.388 -6.146,0.222 -6.256,-0.307 -6.372,-0.957 -6.395,-1.652 -6.418,-2.414 -6.372,-3.177 -6.295,-3.891 -6.075,-3.891 -5.754,-3.767 -5.414,-3.531 -5.439,-2.96 -5.484,-2.365 -5.462,-1.777 -5.393,-1.136 -5.302,-0.427 -5.214,-0.033 -5.049,0.179
  Top region: -8.029,-5.319 -7.074,-5.584 -6.835,-4.891 -6.906,-4.725 -6.795,-4.196 -6.679,-3.546 -6.656,-2.852 -6.633,-2.09 -6.679,-1.326 -6.756,-0.613 -6.976,-0.613 -7.297,-0.736 -7.638,-0.972 -7.613,-1.544 -7.567,-2.138 -7.589,-2.726 -7.658,-3.368 -7.749,-4.077 -7.837,-4.47 -8.002,-4.683
  Top keep-out circle w0.102: c6.548,2.24 r3.727
  Top keep-out circle w0.102: c-6.548,-2.24 r3.727

## Part data
C1 C2 C3 C4 C6 C7 C8 C9 C10 C11 C12 C14 C15 R1 R2 R3 R4 R5 R6 R7 R8 R9 R10 R11 R12 R14 R15 R16 R18 R19 R20 R21: library part 0603, PackageName=0603
C5: library part EIA6032-28/C-R, PackageName=EIA6032-28/C-R
C13: library part 1206, PackageName=1206
D1 D3 D4 D5: library part SOD-123, PackageName=SOD-123
D2: library part WL-SBCW-0606, PackageName=WL-SBCW-0606
J1: library part 4-JACK-SMD, PackageName=4-JACK-SMD
P1: library part FPC-50-CON, PackageName=FPC-50-CON
P2: library part JSTPH2, PackageName=JSTPH2
P3: library part LINK_CONNECTOR, PackageName=LINK_CONNECTOR
Q1: library part SOT23-WIDE, PackageName=SOT23-WIDE
R17: library part RK10J12E0A0A, PackageName=RK10J12E0A0A
S1: library part D-PAD, PackageName=D-PAD
S2 S3: library part SHOULDER_BUTTON, PackageName=SHOULDER_BUTTON
S4: library part START_SELECT_BUTTON, PackageName=START_SELECT_BUTTON
S5: library part AB_BUTTON, PackageName=AB_BUTTON
S6: library part PWR-SWITCH, PackageName=PWR-SWITCH
SP1: library part SPEAKER, PackageName=SPEAKER
U1: library part SOT23, PackageName=SOT23
U2: library part SC-70-6, PackageName=SC-70-6
U3 U4: library part TSSOP-8, PackageName=TSSOP-8
U5: library part SO-8, PackageName=SO-8
U6: library part RPI-SMD, PackageName=RPI-SMD
U7: library part POWERBOOST-1000C, PackageName=POWERBOOST-1000C
U$1: library part SIGNATURE, PackageName=SIGNATURE

## Free pads (board coordinates)
  round 3 hole 3 unplated: MH1(-11.623,2.243) MH2(6.063,44.945) MH5(96.397,44.889) MH6(114.503,1.968)
  round 1.27 hole 1.27 unplated: MH1(8.868,-1.018) MH2(1.58,1.21)
  round 1.651 hole 1.651 unplated: MH1(91.449,-5.91) MH2(89.051,0.677)
  round 2.54 hole 2.54 unplated: MH3(16.301,58.801) MH4(86.448,58.697) MH11(-10.257,17.021) MH12(112.578,20.732)
  round 2.5 hole 2.5 unplated: MH7(3.79,6.28) MH8(-1.991,15.566) MH9(105.349,25.413)
  round 3.8 hole 3.8 unplated: MH10(100.223,36.131)

## Via types
v1: diameter 0.905/0.905/0.905/0.905/0.905/0.905/0.905/0.905/0.905/0.905/0.905/0.905/0.905/0.905/0.905/0.905 (per signal layer), hole 0.6, Top to Bottom, 51 vias

## Nets (pads, with @x,y where several pads share a name; then routed paths per layer and width w, separated by ;. In a path a pad name is that pad's centre, name@x,y a point inside that pad or via, vN(x,y) a via of type N, cw(c..) or ccw(c..) an arc to the next point about the centre after c; other vN are vias at no path point)
3.3V: C1.2 C6.1 C8.1 C11.1 C12.1 P1.7 P1.8 P1.9 P1.40 P1.41 P1.42 R2.2 R8.2 U1.3 U2.5 U6.1 U6.17 | length 127.5
  Top w0.356: P1.7 P1.8 P1.9 ; P1.40 P1.41 P1.42
  Top w0.508: C6.1@47.233,22.214 C6.1 ; C8.1@49.265,22.214 C8.1 ; U1.3@51.891,22.214 U1.3 ; R8.2 57.352,22.214
  Top w0.813: v1(27.243,35.984) 40.502,35.984 ; R2.2 U1.3@51.424,22.214 ; 57.352,22.214 51.891,22.214 U1.3@51.424,22.214 ; v1(88.508,39.74) 84.751,35.984 v1(47.36,35.984) P1.41 40.502,35.984 ; 40.502,35.984 40.502,20.182 41.2,19.484 P1.8 43.613,19.484 46.344,22.214 47.233,22.214 49.265,22.214 U1.3@51.424,22.214
  Bottom w0.508: C12.1 C12.1@23.735,30.279 ; U6.17@47.36,30.533 U6.17
  Bottom w0.635: U2.5 v1(88.508,39.74)
  Bottom w0.813: C11.1 C12.1 ; C12.1@23.735,30.279 U6.1 v1(27.243,35.984) ; U6.17@47.36,30.533 v1(47.36,35.984) ; C1.2 88.508,40.59 v1(88.508,39.74)
+5V: C2.1 C4.1 C7.1 C9.1 C14.1 C15.1 D2.VCC D4.A R4.1 R5.1 R6.1 R7.1 R11.2 R17.3 R17.3O U5.1 U6.2 U6.4 U7.5V | length 220.3
  Top w0.508: R7.1 R7.1@49.176,20.944 ; 49.138,14.086 49.138,14.724 R4.1 R4.1@49.343,14.594
  Top w0.813: v1(28.564,56.504) 47.233,56.504 U7.5V v1(77.244,54.218) v1(90.706,40.756) 98.16,40.756 100.7,43.296 100.7,48.884 99.485,50.098 D2.VCC ; v1(29.783,22.468) 34.152,22.468 43.296,13.324 48.376,13.324 49.138,14.086 ; R4.1 R5.1 R6.1 R7.1 ; R4.1@49.343,14.594 C9.1
  Bottom w0.508: C14.1 cw(c49.349,56.548) C14.1@49.519,56.598
  Bottom w0.813: U6.2 28.564,24.818 ; v1(28.564,56.504) 28.564,24.818 ; v1(29.783,22.468) U6.4 28.564,24.818 ; U7.5V C14.1@49.519,56.598 ; v1(77.244,54.218) 81.396,54.218 D4.A ; C15.1 C7.1 85.547,18.277 U5.1 ; v1(90.706,40.756) C2.1 C4.1 90.706,19.332 89.651,18.277 U5.1 ; R17.3O R17.3 100.447,10.53 92.826,10.53 90.96,12.396 R11.2 88.508,18.277 U5.1
AUD_PWM: U2.1 U6.33 | length 22.6
  Bottom w0.254: U6.33 67.883,32.831 74.142,39.09 U2.1
BAT: P2.BAT U7.BAT | length 28.8
  Top w0.813: v1(27.04,52.186) v1(30.088,52.186)
  Bottom w0.508: P2.BAT P2.BAT@12.581,37.728
  Bottom w0.813: P2.BAT@12.581,37.728 v1(27.04,52.186) ; v1(30.088,52.186) 32.247,52.186 U7.BAT
BKLT: R1.2 U6.36 | length 14.7
  Top w0.254: R1.2 v1(70.423,18.404)
  Bottom w0.254: v1(70.423,18.404) U6.36
BKLT_PWM: R3.2 U6.12 | length 30
  Top w0.254: v1(47.614,27.802) 58.79,27.802 62.179,24.412 R3.2
  Bottom w0.254: U6.12 39.994,24.868 39.994,26.786 41.01,27.802 v1(47.614,27.802)
BTN_A: S5.A@1 S5.A@2 U6.38 | length 43.4
  Top w0.254: v1(77.078,27.548) 82.068,32.538 108.082,32.538 cw(c110.38,32.538) 110.38,34.836 111.322,34.836
  Bottom w0.254: U6.38 73.014,24.868 73.014,25.77 74.792,27.548 v1(77.078,27.548)
BTN_B: S5.B@1 S5.B@2 U6.40 | length 25.4
  Top w0.254: v1(77.078,24.754) 80.381,28.058 94.985,28.058 cw(c97.283,28.058) 97.283,30.355 98.225,30.355
  Bottom w0.254: U6.40 75.566,24.754 v1(77.078,24.754)
BTN_D: S1.DOWN U6.15 | length 71
  Top w0.254: S1.DOWN@-0.198,21.832 7.354,21.832 31.104,45.582 v1(45.023,45.582)
  Bottom w0.254: U6.15@44.566,30.736 U6.15 v1(45.023,45.582)
BTN_L: S1.LEFT U6.13 | length 77.3
  Top w0.254: S1.LEFT -4.147,29.128 14.34,47.614 v1(42.483,47.614)
  Bottom w0.254: U6.13 v1(42.483,47.614)
BTN_LS: S2.SW U6.7 | length 58.2
  Top w0.254: S2.SW -2.412,49.646 v1(34.863,49.646)
  Bottom w0.254: U6.7 v1(34.863,49.646)
BTN_R: S1.RIGHT U6.27 | length 73.7
  Top w0.254: S1.RIGHT 22.27,46.598 v1(56.707,46.598)
  Bottom w0.254: v1(56.707,46.598) 60.263,43.042 U6.27
BTN_RS: S3.SW U6.37 | length 50.3
  Top w0.254: v1(73.014,33.466) 102.808,33.466 109.844,40.502 109.844,45.582 110.517,46.256 110.517,47.453 S3.SW
  Bottom w0.254: U6.37 73.014,30.279 v1(73.014,33.466)
BTN_SEL: S4.SEL U6.32 | length 74.2
  Top w0.254: S4.SEL 12.308,5.859 12.308,11.546 14.086,13.324 v1(19.928,13.324)
  Bottom w0.254: v1(19.928,13.324) 62.092,13.324 65.394,16.626 65.394,24.767 U6.32
BTN_STR: S4.STR U6.28 | length 62.4
  Top w0.254: S4.STR@8.744,10.291 12.539,14.086 v1(21.452,14.086)
  Bottom w0.254: v1(21.452,14.086) 57.774,14.086 60.314,16.626 60.314,24.767 U6.28
BTN_U: S1.UP U6.11 | length 65.5
  Top w0.254: S1.UP -1.916,39.3 -1.916,40.248 6.466,48.63 v1(39.943,48.63)
  Bottom w0.254: U6.11 v1(39.943,48.63)
BYPASS: C10.1 U5.7 | length 2.4
  Bottom w0.254: U5.7 95.405,19.547 C10.1
GND: C1.1 C2.2 C3.2 C4.2 C6.2 C7.2 C8.2 C9.2 C10.2 C11.2 C12.2 C14.2 C15.2 J1.1 P1.6 P1.43 P1.48 P1.49 P1.50 P2.GND P3.5 P3.6 P3.GND@1 P3.GND@2 Q1.2 R10.2 R17.1 R20.1 S1.GND@1 S1.GND@2 S1.GND@3 S1.GND@4 S2.GND@1 S2.GND@2 S2.GND@3 S3.GND@1 S3.GND@2 S3.GND@3 S4.GND@1 S4.GND@2 S4.GND@3 S4.GND@4 S5.GND@1 S5.GND@2 S5.GND@3 S5.GND@4 S6.C@1 S6.C@2 S6.GND@1 S6.GND@2 U1.1 U2.2 U3.4 U4.4 U5.6 U6.6 U6.9 U6.14 U6.20 U6.25 U6.30 U6.34 U6.39 U7.GND@1 U7.GND@2
LBO: U3.6 U6.29 U7.LBO | length 57.4
  Top w0.254: U7.LBO 45.709,52.948 v1(62.854,52.948) v1(74.72,52.948)
  Bottom w0.254: U6.29 62.854,30.329 v1(62.854,52.948) ; U3.6 v1(74.72,52.948)
MISO: P1.33 U6.21 | length 13.4
  Top w0.254: P1.33 43.686,31.984 44.058,31.612 51.678,31.612 v1(52.694,32.628)
  Bottom w0.254: U6.21 52.694,30.329 v1(52.694,32.628)
MOSI: P1.34 R19.2 | length 4.5
  Top w0.254: P1.34 45.748,32.484 R19.2
MOSI_3V: R19.1 U6.19 | length 4.1
  Top w0.254: R19.1 48.463,32.628 v1(50.103,32.628)
  Bottom w0.254: U6.19 v1(50.103,32.628)
N$1: P1.1 Q1.3 | length 18.7
  Top w0.254: P1.1 43.424,14.848 v1(43.753,14.848) ; v1(56.25,14.848) 58.028,14.848 58.79,15.61 58.79,16.731 Q1.3
  Bottom w0.254: v1(43.753,14.848) v1(56.25,14.848)
N$2: P1.5 R7.2 | length 6.3
  Top w0.33: P1.5 43.383,17.984 46.257,20.858 R7.2
N$3: P1.4 R6.2 | length 5.6
  Top w0.33: P1.4 43.645,17.484 44.987,18.826 R6.2
N$4: P1.3 R5.2 | length 5.1
  Top w0.254: R5.2@47.086,16.984 R5.2
  Top w0.33: P1.3 R5.2@47.086,16.984
N$5: R16.2 U4.2 | length 7.5
  Bottom w0.356: U4.2 82.483,44.495 82.666,44.312 88.928,44.312 R16.2
N$6: D1.C R1.1 R3.1 | length 8.8
  Top w0.254: D1.C 53.781,20.436 R3.1 R1.1
N$7: D1.A Q1.1 R2.1 | length 6
  Top w0.254: R2.1 51.544,16.808 D1.A 54.772,17.871 Q1.1
N$8: D2.R R16.1 | length 9.6
  Top w0.356: v1(93.334,45.582) 95.112,47.36 97.144,47.36 98.143,48.36 D2.R
  Bottom w0.356: R16.1 92.318,44.566 v1(93.334,45.582)
N$9: P1.15 P1.16 P1.17 P1.18 P1.19 P1.20 P1.21 P1.22 P1.23 P1.24 P1.25 P1.26 P1.27 P1.28 P1.29 P1.30 P1.31 P1.32 | length 8.5
  Top w0.254: P1.15 P1.16 P1.17 P1.18 P1.19 P1.20 P1.21 P1.22 P1.23 P1.24 P1.25 P1.26 P1.27 P1.28 P1.29 P1.30 P1.31 P1.32
N$10: P1.2 R4.2 | length 5.9
  Top w0.254: R4.2@47.22,14.706 ccw(c47.27,14.812) R4.2
  Top w0.33: P1.2 43.692,16.484 45.47,14.706 R4.2@47.22,14.706
N$11: R15.2 U4.5 | length 9.3
  Bottom w0.356: U4.5 81.182,48.335 82.412,47.106 R15.2
N$12: D2.G R15.1 | length 6.7
  Top w0.356: v1(93.334,47.868) 93.842,48.376 96.021,48.376 D2.G
  Bottom w0.356: R15.1 92.572,47.106 v1(93.334,47.868)
N$13: R14.2 U4.7 | length 8.3
  Bottom w0.356: U4.7 82.483,48.305 82.92,47.868 87.658,47.868 R14.2
N$14: D2.B R14.1 | length 6.2
  Top w0.356: v1(93.334,49.646) 95.421,49.646 95.874,50.098 D2.B
  Bottom w0.356: R14.1 93.08,49.392 v1(93.334,49.646)
N$15: U3.7 U4.1 | length 10
  Top w0.254: v1(76.062,47.868) v1(80.38,47.868)
  Bottom w0.254: U3.7 75.371,48.559 v1(76.062,47.868) ; v1(80.38,47.868) 80.888,47.868 83.133,45.623 U4.1
N$16: U3.1 U3.3 U4.6 | length 14.9
  Top w0.254: v1(79.11,44.312) v1(79.11,47.106)
  Bottom w0.254: U3.3 74.72,44.637 75.046,44.312 76.021,44.312 ; U3.1 76.021,44.312 ; v1(79.11,44.312) 76.021,44.312 ; v1(79.11,47.106) 79.11,49.646 79.618,50.154 81.396,50.154 81.832,49.717 U4.6
N$17: R21.2 S6.R | length 7.3
  Bottom w0.254: R21.2 -1.924,7.482 S6.R
N$18: D3.C R21.1 U7.EN | length 88.8
  Top w0.254: v1(5.704,50.662) v1(39.359,50.662)
  Bottom w0.254: D3.C -5.306,10.784 R21.1 -5.306,39.652 v1(5.704,50.662) ; v1(39.359,50.662) U7.EN
N$19: D4.C D5.C U3.8 U4.8 | length 11.3
  Bottom w0.635: U3.8 76.021,50.439 D5.C 80.49,52.258 D4.C 82.229,51.352 83.133,50.449 U4.8
N$20: R9.2 U2.6 | length 2.7
  Bottom w0.254: R9.2 87.135,36.502 87.135,39.09 U2.6
N$21: C3.1 C5.+ R9.1 R10.1 | length 6.7
  Bottom w0.254: R9.1 C3.1 R10.1 85.372,30.923 C5.+
N$22: P1.47 R12.2 | length 4.7
  Top w0.254: P1.47 46.261,38.984 R12.2
N$23: C5.- U5.2 | length 10
  Bottom w0.254: C5.- 89.255,25.023 89.854,24.424 89.854,20.258 89.27,19.674 88.321,19.674 U5.2
N$24: 
PWR_EN_RPI: D3.A U6.16 | length 54.2
  Bottom w0.254: D3.A 3.235,16.372 39.486,16.372 45.074,21.96 45.074,24.767 U6.16
PWR_SW_SEN: S6.L U6.26 | length 66.9
  Bottom w0.254: S6.L 9.741,11.012 14.34,15.61 54.218,15.61 57.774,19.166 57.774,24.767 U6.26
RING: C13.2 J1.2 J1.3 R20.2 | length 24.3
  Bottom w0.254: J1.3 J1.2 R20.2 94.096,1.93 C13.2
RT_INT: P1.46 U6.18 | length 20.8
  Top w0.254: P1.46 48.884,38.484 v1(48.884,38.216)
  Bottom w0.254: U6.18 48.884,26.138 v1(48.884,38.216)
RXD: P3.3 U6.10 | length 56.1
  Top w0.254: v1(38.724,44.566) v1(60.822,44.566)
  Bottom w0.254: U6.10 38.724,26.138 v1(38.724,44.566) ; P3.3 60.847,56.784 60.847,44.591 v1(60.822,44.566)
SCL: P1.44 U6.5 | length 17.2
  Top w0.254: v1(32.323,37.222) 32.323,37.484 P1.44
  Bottom w0.254: U6.5 v1(32.323,37.222)
SCLK: P1.37 R18.2 | length 4.8
  Top w0.254: P1.37 46.764,33.984 R18.2
SCLK_3V: R18.1 U6.23 | length 10.9
  Top w0.254: R18.1 48.463,34.406 v1(55.183,34.406)
  Bottom w0.254: U6.23 v1(55.183,34.406)
SDA: P1.45 U6.3 | length 20.2
  Top w0.254: v1(29.783,37.968) 29.783,37.984 P1.45
  Bottom w0.254: U6.3 v1(29.783,37.968)
SENSE: J1.5 R11.1 U5.3 | length 19.5
  Bottom w0.254: J1.5 88.508,5.853 R11.1 84.698,14.506 84.698,19.42 86.095,20.817 U5.3
TFT_CS_3V: P1.38 U6.24 | length 25.2
  Top w0.254: P1.38 43.373,34.484 44.058,35.168 56.25,35.168 v1(56.504,34.914)
  Bottom w0.254: U6.24 56.504,26.138 v1(56.504,34.914)
TFT_DC_3V: P1.36 U6.22 | length 18.3
  Top w0.254: P1.36 v1(51.424,33.484)
  Bottom w0.254: v1(51.424,33.484) 51.424,26.138 U6.22
TFT_RST: P1.10 R8.1 R12.1 U1.2 | length 38.9
  Top w0.254: P1.10@42.288,20.472 P1.10 43.343,20.484 46.42,23.56 50.941,23.56 ; R12.1 48.966,38.984 v1(53.913,38.984) ; U1.2 50.941,23.56 ; v1(53.913,26.608) 53.913,23.56 ; R8.1 56.286,23.56 53.913,23.56 ; 50.941,23.56 53.913,23.56
  Bottom w0.254: v1(53.913,26.608) v1(53.913,38.984)
TXD: P3.4 U6.8 | length 55
  Top w0.254: v1(36.184,49.646) v1(59.806,49.646)
  Bottom w0.254: U6.8 36.184,26.138 v1(36.184,49.646) ; P3.4 59.806,55.666 v1(59.806,49.646)
USB: D5.A P3.1 P3.2 U3.2 U3.5 U4.3 U7.USB | length 66.9
  Top w0.813: U7.USB 34.279,51.678 v1(57.63,51.678) v1(73.268,51.678)
  Bottom w0.61: v1(73.268,51.678) 73.268,49.081 ; U3.5 73.268,49.081 ; U3.2 75.371,46.09 ; D5.A 77.84,46.09 ; U4.3 81.832,46.09 77.84,46.09 ; 73.268,49.081 73.268,48.376 75.371,46.273 75.371,46.09 ; 75.371,46.09 77.84,46.09
  Bottom w0.813: v1(57.63,51.678) P3.2 P3.1
VO1: C13.1 SP1.1 U5.5 | length 33
  Bottom w0.254: C13.1 94.096,13.07 91.81,15.356 91.81,21.706 92.191,22.087 U5.5 104.958,22.087 SP1.1
VO2: SP1.2 U5.8 | length 20.5
  Bottom w0.254: U5.8 105.268,18.277 SP1.2
VOL/SD: R17.2 U5.4 | length 24.4
  Top w0.254: v1(86.222,21.96) 101.764,6.418 R17.2
  Bottom w0.254: v1(86.222,21.96) 88.194,21.96 U5.4
pads on no net: J1.4 P1.11 P1.12 P1.13 P1.14 P1.35 P1.39 P1.PAD1 P1.PAD2 P2.NC1 P2.NC2 R17.2O R17.P$6 R17.P$7 U2.3 U2.4 U6.31 U6.35 U7.VS

## Polygon pours and split planes (outlines as drawn)
GND on Top "Polygon_1_Net_GND" (solid, remove dead copper, pour order 1): -15.759,-11.949 117.083,-11.949 117.083,61.203 -15.759,61.203
GND on Bottom "Polygon_2_Net_GND" (solid, remove dead copper, pour order 0): -15.759,-11.949 117.083,-11.949 117.083,61.203 -15.759,61.203

## Keep-outs
Keep-Out Layer:
  the board outline again, w0

## Silkscreen, mask and mechanical layers (free items; w line width, h text height)
Bottom Overlay:
  text "gbaZero lvl.2" at 5.958,37.2 h1.38
  text "Adam Feinstein" at 5.958,35.32 h1.04
  text "(C) 1/2017" at 5.958,33.492 h1.04
  text "Audio fixed by" at 5.958,31.663 h1.04
  text "Dr. Adam T. Barth" at 5.958,29.834 h1.04
  text "Mech help from" at 5.958,28.005 h1.04
  text "Scott Downen" at 5.958,26.176 h1.04
  text "For Saba" at 5.958,24.348 h1.04
  text "Thanks for the" at 5.958,22.519 h1.04
  text "calipers" at 5.958,20.69 h1.04
  text "VO1" at 113.146,14.848 h0.86 r270
  text "VO2" at 113.146,10.784 h0.86 r270
Dimension:
  the board outline again, w0.127
tDocu:
  circle w1.016: c97.443,49.598 r2.692
bPlace:
  circle w0.013: c6.063,44.945 r3.353
  circle w0.013: c96.397,44.889 r3.353

## Text inside footprints (layer, text, board x,y; h text height)
P1: tDocu "1" at 35.968,16.634 h0.86 r270; tDocu "50" at 35.968,39.434 h0.86 r270
U6: tPlace "2" at 24.386,25.33 h0.86 r180; tPlace "1" at 24.386,31.68 h0.86 r180